# Altium PCB pcb_heater.PcbDoc
Units mm, origin at the board's own origin, x right, y up, seen from the top; angles counter-clockwise.
Board outline 238 x 189 mm, 2 copper layers (Top Layer, Bottom Layer); 2 components, 2 nets, 16 pads, 0 vias.
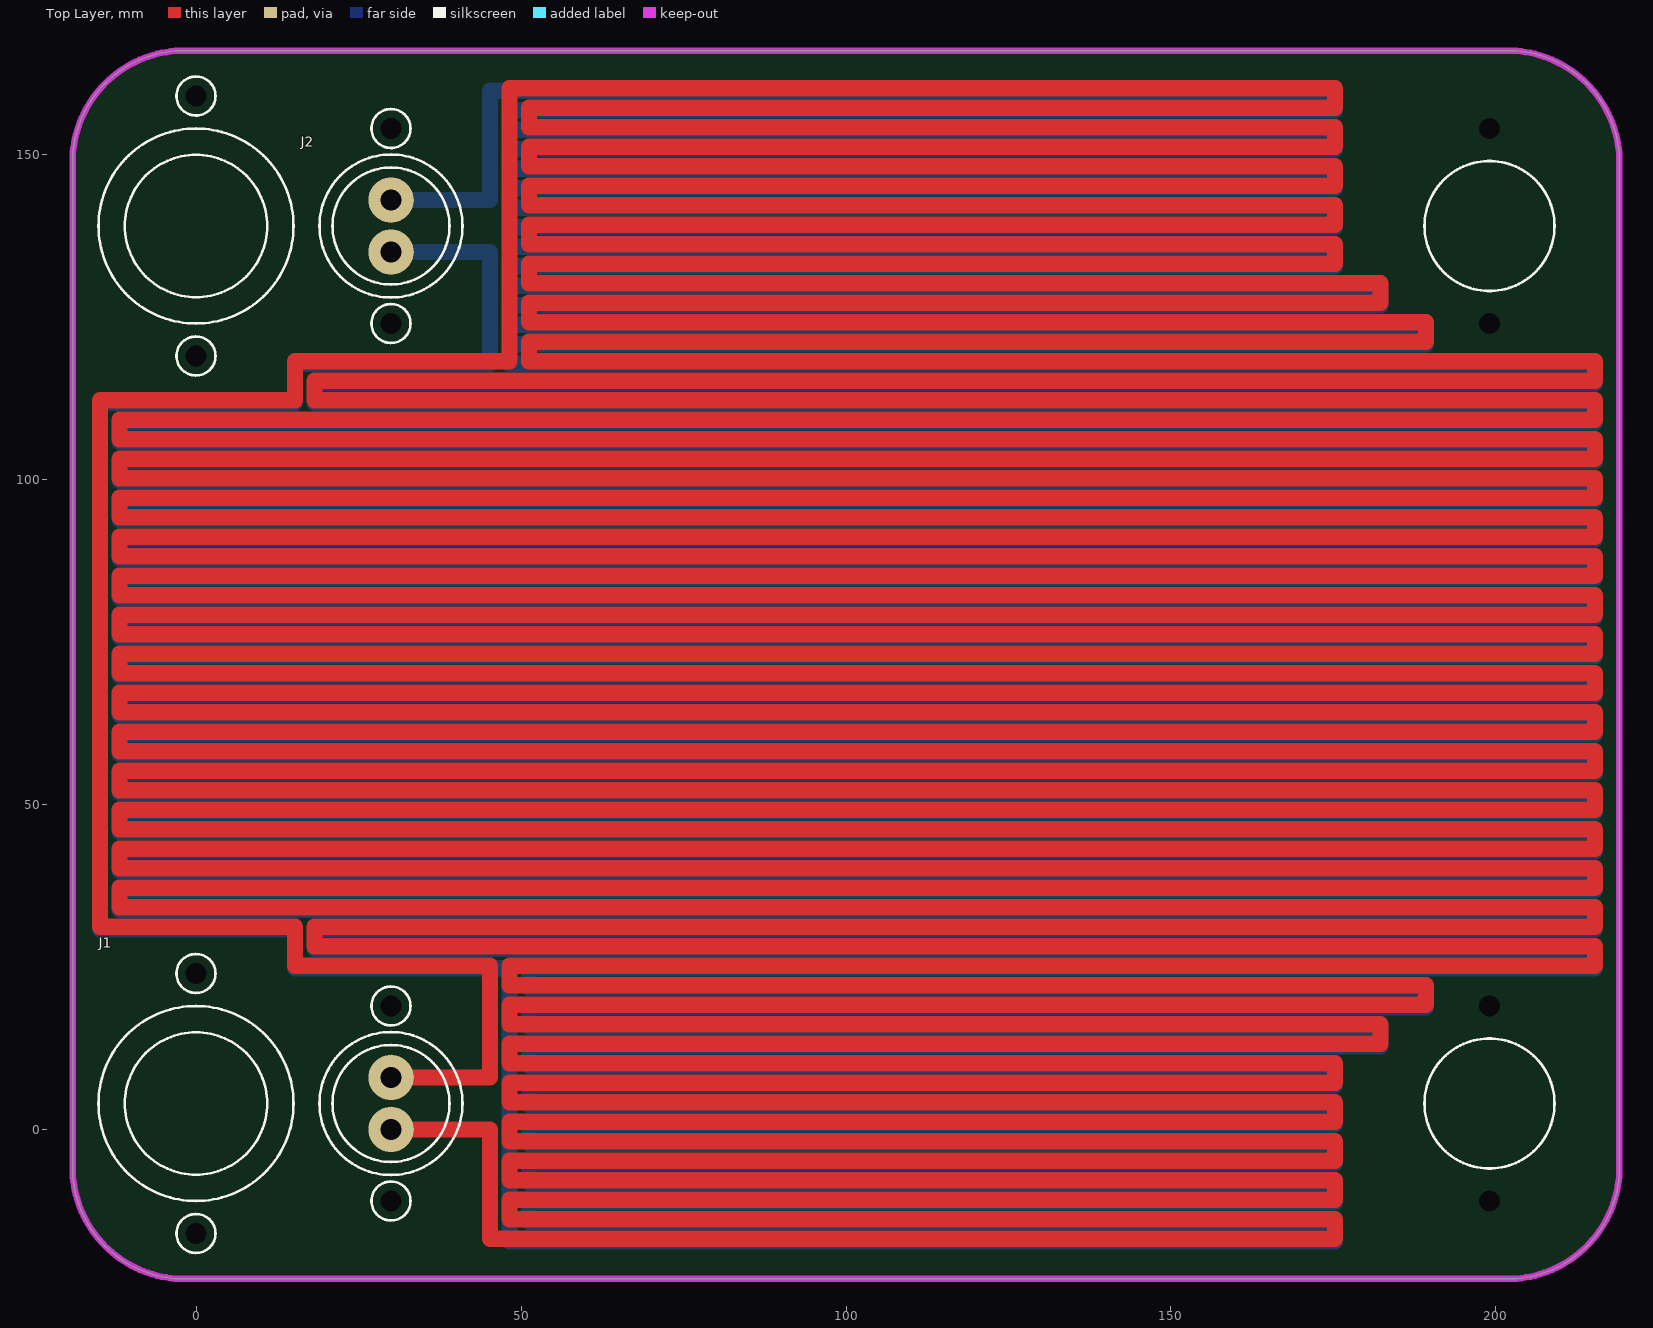
[diagram p0: Top Layer view]
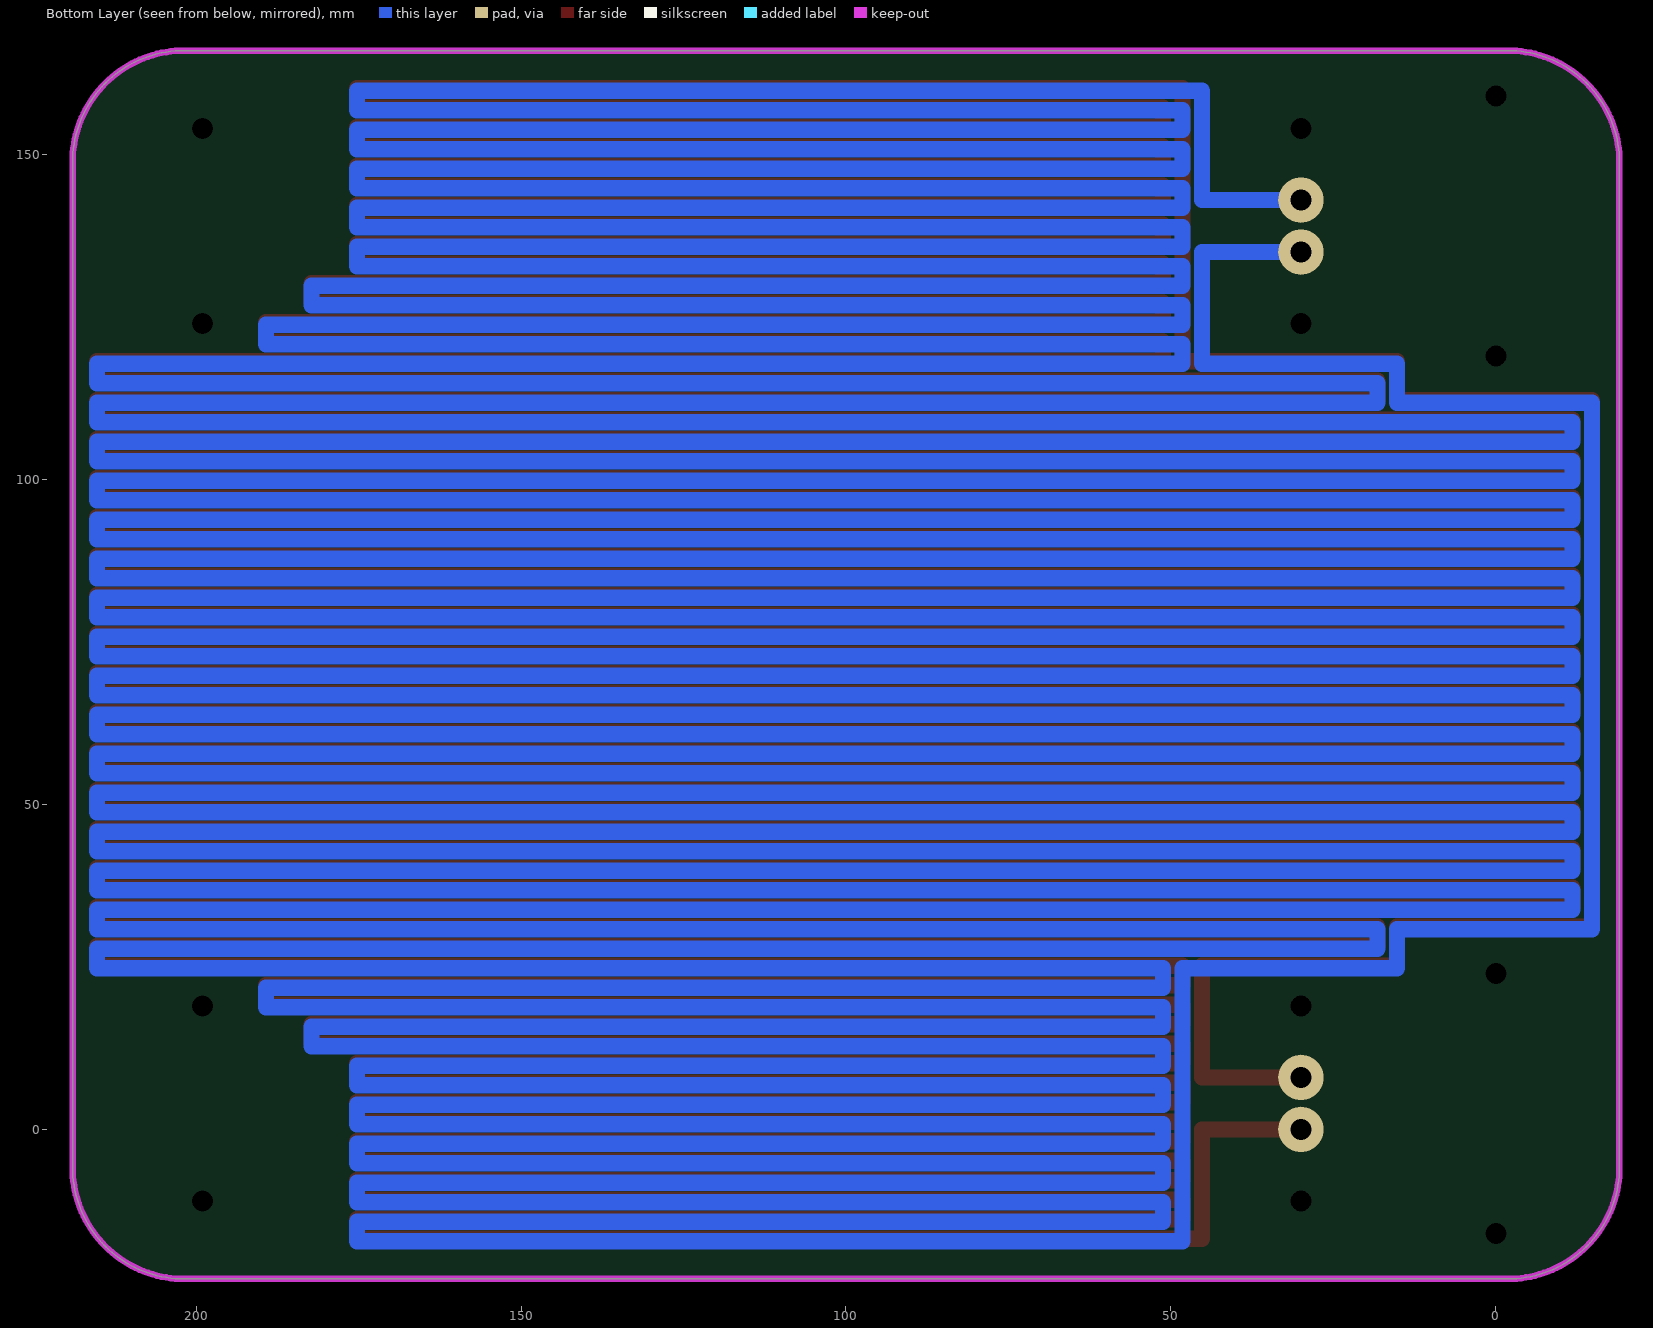
[diagram p1: Bottom Layer view, seen from below]

## Layer stack, top to bottom
Top Solder: solder mask 0.0102, Solder Resist, Dk 3.5
Top Layer: signal copper 0.0356
Dielectric 1: dielectric 0.32, FR-4, Dk 4.8
Bottom Layer: signal copper 0.0356
Bottom Solder: solder mask 0.0102, Solder Resist, Dk 3.5

## Board outline
-19,-5.779 ccw(c-1.779,-5.779) -1.779,-23 13,-23 199,-23 201.779,-23 ccw(c201.779,-5.779) 219,-5.779 219,148.779 ccw(c201.779,148.779) 201.779,166 34.24,166 -1.779,166 ccw(c-1.779,148.779) -19,148.779

## Design rules (kind name [scope] priority, off if disabled: settings)
Clearance [All] p1: gap=0.35 ignorepadtopadclearanceinfootprint=FALSE
HoleSize [All] p1: absolutevalues=TRUE maxlimit=5 minlimit=0.025 maxpercent=80.000 minpercent=20.000
Length [InNet('top') or InNet('bottom')] p1: maxlimit=2000 minlimit=2000
PolygonConnect [All] p1: connectstyle=Relief reliefconductorwidth=0.254 reliefentries=4 polygonreliefangle="90 Angle" airgapwidth=0.254
RoutingVias [All] p1: holewidth=0.711 width=1.27 viastyle="Through Hole" minholewidth=0.711 minwidth=1.27 maxholewidth=0.711 maxwidth=1.27
SolderMaskExpansion [All] p1: expansion=0.102 istentingtop=FALSE
Width Width_1 [InNet('top') or InNet('bottom')] p1: maxlimit=7 minlimit=2 preferedwidth=2.65
Width [All] p2: maxlimit=3.13 minlimit=0.254 preferedwidth=0.254
29 further rules are at their usual default settings.

## Components (designator, comment, footprint, x,y, rotation, side; value= is the part's Value field where it differs from the comment)
J1 "Connector, PCB heater" PCB_HEATER_CONNECTOR 0,4 r0 top
J2 "Connector, PCB heater" PCB_HEATER_CONNECTOR 0,139 r0 top

## Footprints (in the part's own frame and the unit in brackets; to place one, negate y for a bottom-side part, rotate by r counter-clockwise, add the part's x,y. Pads: shape width x height; smd on the part's side, far side on the other; paste and mask are expansions set on the pad)
PCB_HEATER_CONNECTOR [mm]
  round 7 hole 3.2 mask+0: 1(30,-4) 2(30,4)
  round 3.1 hole 3.2 mask+0: 7(0,-20) 7(0,20) 7(30,-15) 7(30,15)
  silkscreen extent -15,-23 41,23

## Free pads (board coordinates)
  round 0.5 hole 3.2 mask+0: 8(199,-11) 8(199,19) 8(199,124) 8(199,154)

## Nets (pads, with @x,y where several pads share a name; then routed paths per layer and width w, separated by ;. In a path a pad name is that pad's centre, name@x,y a point inside that pad or via, vN(x,y) a via of type N, cw(c..) or ccw(c..) an arc to the next point about the centre after c; other vN are vias at no path point)
bottom: J2.1 J2.2 | length 11124.5
  Bottom Layer w2.5: J2.1 45.24,135 45.24,117.82 15.24,117.82 15.24,111.82 -14.76,111.82 -14.76,30.82 15.24,30.82 15.24,24.82 48.24,24.82 48.24,18.82 48.24,-17.18 175.24,-17.18 175.24,-14.18 51.24,-14.18 51.24,-11.18 175.24,-11.18 175.24,-8.18 51.24,-8.18 51.24,-5.18 175.24,-5.18 175.24,-2.18 51.24,-2.18 51.24,0.82 175.24,0.82 175.24,3.82 51.24,3.82 51.24,6.82 175.24,6.82 175.24,9.82 51.24,9.82 51.24,12.82 182.24,12.82 182.24,15.82 51.24,15.82 51.24,18.82 189.24,18.82 189.24,21.82 51.24,21.82 51.24,24.82 215.24,24.82 215.24,27.82 18.24,27.82 18.24,30.82 215.24,30.82 215.24,33.82 -11.76,33.82 -11.76,36.82 215.24,36.82 215.24,39.82 -11.76,39.82 -11.76,42.82 215.24,42.82 215.24,45.82 -11.76,45.82 -11.76,48.82 215.24,48.82 215.24,51.82 -11.76,51.82 -11.76,54.82 215.24,54.82 215.24,57.82 -11.76,57.82 -11.76,60.82 215.24,60.82 215.24,63.82 -11.76,63.82 -11.76,66.82 215.24,66.82 215.24,69.82 -11.76,69.82 -11.76,72.82 215.24,72.82 215.24,75.82 -11.76,75.82 -11.76,78.82 215.24,78.82 215.24,81.82 -11.76,81.82 -11.76,84.82 215.24,84.82 215.24,87.82 -11.76,87.82 -11.76,90.82 215.24,90.82 215.24,93.82 -11.76,93.82 -11.76,96.82 215.24,96.82 215.24,99.82 -11.76,99.82 -11.76,102.82 215.24,102.82 215.24,105.82 -11.76,105.82 -11.76,108.82 215.24,108.82 215.24,111.82 18.24,111.82 18.24,114.82 215.24,114.82 215.24,117.82 48.24,117.82 48.24,120.82 189.24,120.82 189.24,123.82 48.24,123.82 48.24,126.82 182.24,126.82 182.24,129.82 48.24,129.82 48.24,132.82 175.24,132.82 175.24,135.82 48.24,135.82 48.24,138.82 175.24,138.82 175.24,141.82 48.24,141.82 48.24,144.82 175.24,144.82 175.24,147.82 48.24,147.82 48.24,150.82 175.24,150.82 175.24,153.82 ; J2.2 45.24,143 45.24,159.82 175.24,159.82 175.24,156.82 48.24,156.82 48.24,153.82 175.24,153.82
top: J1.1 J1.2 | length 11124.5
  Top Layer w2.5: J1.1 45.24,0 45.24,-16.82 175.24,-16.82 175.24,-13.82 48.24,-13.82 48.24,-10.82 175.24,-10.82 175.24,-7.82 48.24,-7.82 48.24,-4.82 175.24,-4.82 175.24,-1.82 48.24,-1.82 48.24,1.18 175.24,1.18 175.24,4.18 48.24,4.18 48.24,7.18 175.24,7.18 175.24,10.18 48.24,10.18 48.24,13.18 182.24,13.18 182.24,16.18 48.24,16.18 48.24,19.18 189.24,19.18 189.24,22.18 48.24,22.18 48.24,25.18 215.24,25.18 215.24,28.18 18.24,28.18 18.24,31.18 215.24,31.18 215.24,34.18 -11.76,34.18 -11.76,37.18 215.24,37.18 215.24,40.18 -11.76,40.18 -11.76,43.18 215.24,43.18 215.24,46.18 -11.76,46.18 -11.76,49.18 215.24,49.18 215.24,52.18 -11.76,52.18 -11.76,55.18 215.24,55.18 215.24,58.18 -11.76,58.18 -11.76,61.18 215.24,61.18 215.24,64.18 -11.76,64.18 -11.76,67.18 215.24,67.18 215.24,70.18 -11.76,70.18 -11.76,73.18 215.24,73.18 215.24,76.18 -11.76,76.18 -11.76,79.18 215.24,79.18 215.24,82.18 -11.76,82.18 -11.76,85.18 215.24,85.18 215.24,88.18 -11.76,88.18 -11.76,91.18 215.24,91.18 215.24,94.18 -11.76,94.18 -11.76,97.18 215.24,97.18 215.24,100.18 -11.76,100.18 -11.76,103.18 215.24,103.18 215.24,106.18 -11.76,106.18 -11.76,109.18 215.24,109.18 215.24,112.18 18.24,112.18 18.24,115.18 215.24,115.18 215.24,118.18 51.24,118.18 51.24,121.18 189.24,121.18 189.24,124.18 51.24,124.18 51.24,127.18 182.24,127.18 182.24,130.18 51.24,130.18 51.24,133.18 175.24,133.18 175.24,136.18 51.24,136.18 51.24,139.18 175.24,139.18 175.24,142.18 51.24,142.18 51.24,145.18 175.24,145.18 175.24,148.18 51.24,148.18 51.24,151.18 175.24,151.18 175.24,154.18 51.24,154.18 51.24,157.18 175.24,157.18 175.24,160.18 48.24,160.18 48.24,124.18 48.24,118.18 15.24,118.18 15.24,112.18 -14.76,112.18 -14.76,31.18 15.24,31.18 15.24,25.18 45.24,25.18 45.24,8 J1.2
pads on no net: J1.7 J2.7

## Keep-outs
Keep-Out Layer:
  lines w1: -19,-5.779 ccw(c-1.779,-5.779) -1.779,-23 13,-23 199,-23 201.779,-23 ccw(c201.779,-5.779) 219,-5.779 219,27 219,117 219,148.779 ccw(c201.779,148.779) 201.779,166 34.24,166 -1.779,166 ccw(c-1.779,148.779) -19,148.779 -19,28 -19,-5.779

## Silkscreen, mask and mechanical layers (free items; w line width, h text height)
Top Overlay:
  circle w0.4: c199,4 r10
  circle w0.4: c199,139 r10
Mechanical 1:
  lines w0.013: -13.907,3.998 cw(c-2.779,3.998) -13.893,4.575 cw(c-2.894,4.005) -13.826,5.338 cw(c-2.956,3.995) -3.517,14.934 cw(c-2.958,3.818) -2.957,14.948 3.043,14.948 cw(c3.043,3.819) 3.619,14.933 cw(c3.049,3.934) 4.382,14.867 cw(c3.04,3.997) 13.978,4.557 cw(c2.862,3.998) 13.993,3.998 cw(c2.864,3.997) 13.978,3.421 cw(c2.979,3.991) 13.911,2.658 cw(c3.041,4) 3.602,-6.938 cw(c3.043,4.178) 3.043,-6.952 -2.957,-6.952 cw(c-2.958,4.177) -3.534,-6.937 cw(c-2.964,4.062) -4.297,-6.871 cw(c-2.955,3.999) -13.893,3.439 cw(c-2.777,3.997) -13.908,3.998 ; -13.908,138.998 cw(c-2.779,138.998) -13.893,139.575 cw(c-2.894,139.005) -13.826,140.338 cw(c-2.956,138.995) -3.517,149.934 cw(c-2.958,138.818) -2.958,149.948 3.042,149.948 cw(c3.043,138.819) 3.619,149.933 cw(c3.049,138.934) 4.382,149.867 cw(c3.04,138.997) 13.978,139.557 cw(c2.862,138.998) 13.992,138.998 cw(c2.864,138.997) 13.978,138.421 cw(c2.979,138.991) 13.911,137.658 cw(c3.041,139) 3.602,128.062 cw(c3.043,139.178) 3.042,128.048 -2.958,128.048 cw(c-2.958,139.177) -3.534,128.063 cw(c-2.964,139.062) -4.297,128.129 cw(c-2.955,138.999) -13.893,138.439 cw(c-2.777,138.997) -13.908,138.998 ; 185.092,3.998 ccw(c196.223,3.997) 185.107,3.439 ccw(c196.045,3.999) 194.703,-6.871 ccw(c196.036,4.062) 195.466,-6.937 ccw(c196.042,4.177) 196.042,-6.952 202.042,-6.952 ccw(c202.043,4.178) 202.602,-6.938 ccw(c202.041,4) 212.911,2.658 ccw(c201.979,3.991) 212.978,3.421 ccw(c201.864,3.997) 212.992,3.998 ccw(c201.862,3.998) 212.978,4.557 ccw(c202.04,3.997) 203.382,14.867 ccw(c202.049,3.934) 202.619,14.933 ccw(c202.043,3.819) 202.042,14.948 196.042,14.948 ccw(c196.042,3.818) 195.483,14.934 ccw(c196.044,3.995) 185.174,5.338 ccw(c196.106,4.005) 185.107,4.575 ccw(c196.221,3.998) 185.093,3.998 ; 185.093,138.998 cw(c196.221,138.998) 185.107,139.575 cw(c196.106,139.005) 185.174,140.338 cw(c196.044,138.995) 195.483,149.934 cw(c196.042,138.818) 196.043,149.948 202.043,149.948 cw(c202.043,138.819) 202.619,149.933 cw(c202.049,138.934) 203.382,149.867 cw(c202.04,138.997) 212.978,139.557 cw(c201.862,138.998) 212.993,138.998 cw(c201.864,138.997) 212.978,138.421 cw(c201.979,138.991) 212.911,137.658 cw(c202.041,139) 202.602,128.062 cw(c202.043,139.178) 202.043,128.048 196.043,128.048 cw(c196.042,139.177) 195.466,128.063 cw(c196.036,139.062) 194.703,128.129 cw(c196.045,138.999) 185.107,138.439 cw(c196.223,138.997) 185.093,138.998